# Altium PCB UltraZohm_ADC.PcbDoc (part 1 of 2)
Units mm, origin at the board's own origin, x right, y up, seen from the top; angles counter-clockwise.
Board outline 156.27 x 100.35 mm, 4 copper layers (Top Layer, GND, VCC, Bottom Layer), stack 0.778 mm thick; 243 components, 229 nets, 634 pads, 24 vias.
Unrouted connection lines stored in the file: 471.
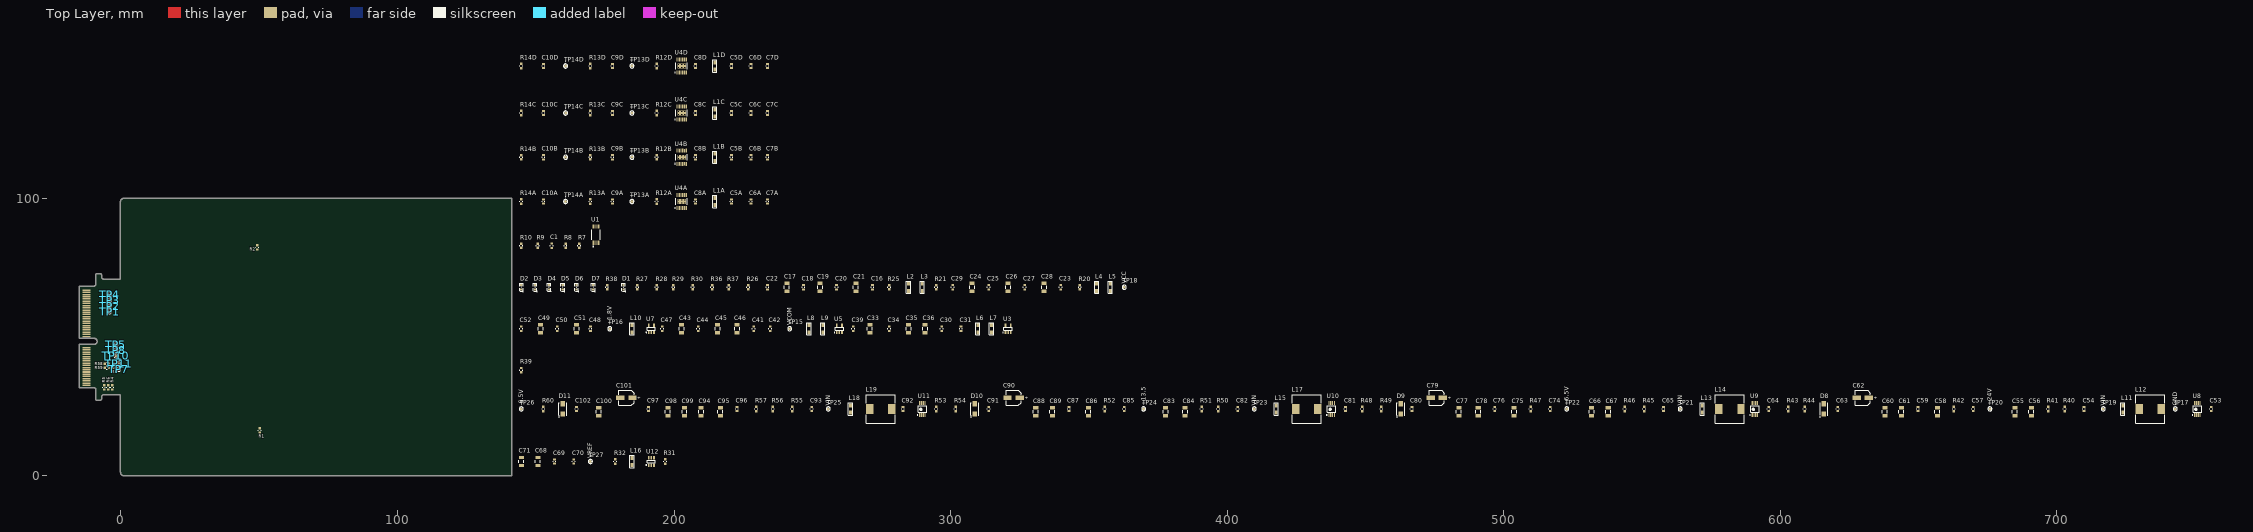
[diagram p0: Top Layer view]
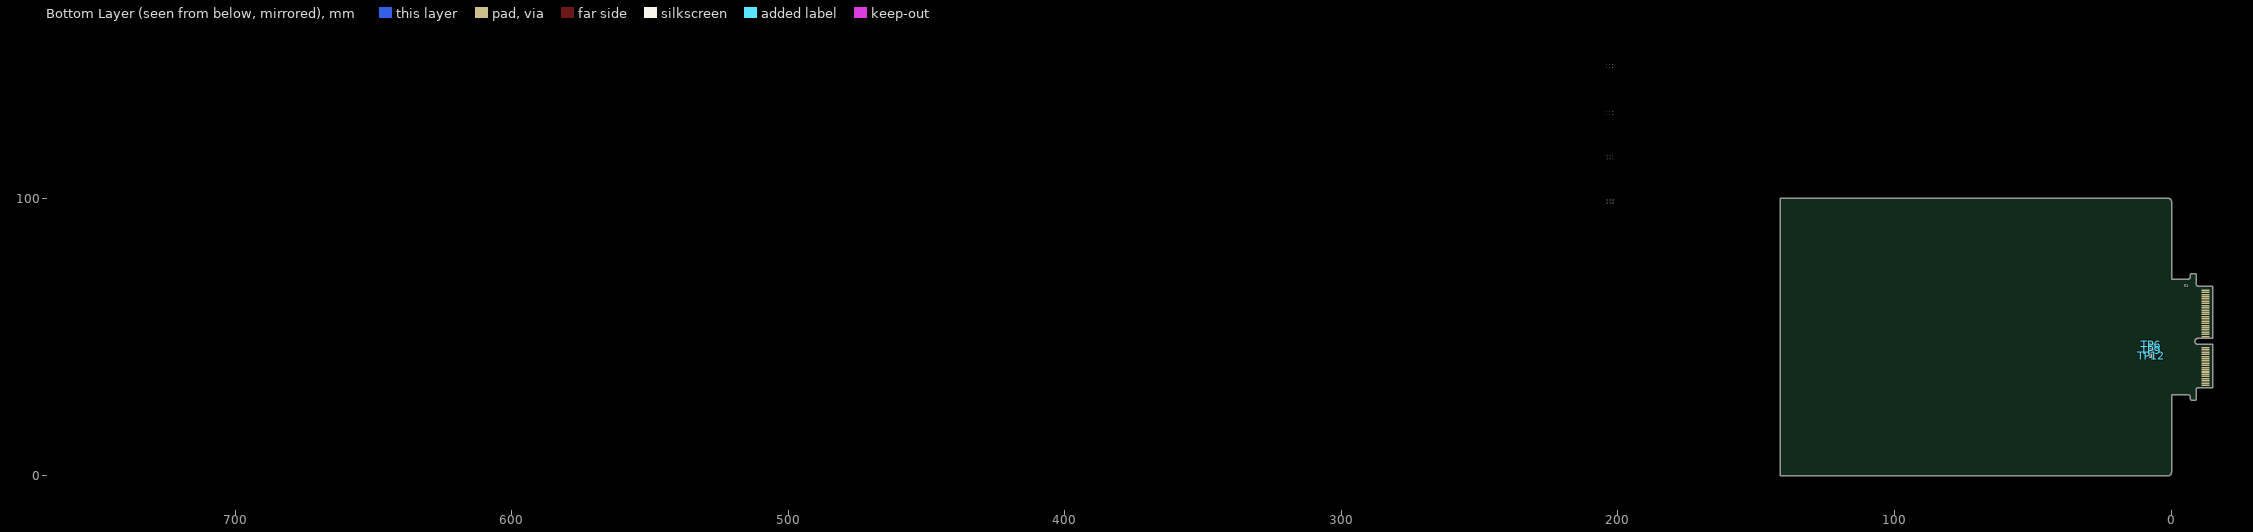
[diagram p1: Bottom Layer view, seen from below]

## Layer stack, top to bottom
Top Solder: solder mask 0.0102, Solder Resist, Dk 3.5
Top Layer: signal copper 0.0356
Dielectric 1: core 0.254, FR-4, Dk 4.2
GND: signal copper 0.036
Dielectric 3: prepreg 0.127, Dk 4.2
VCC: signal copper 0.036
Dielectric 2: core 0.254, Dk 4.2
Bottom Layer: signal copper 0.0356
Bottom Solder: solder mask 0.0102, Solder Resist, Dk 3.5

## Board outline
-14.859,31.694 cw(c-14.859,31.821) -14.986,31.821 -14.986,47.246 cw(c-14.859,47.246) -14.859,47.373 -9.659,47.373 ccw(c-9.659,48.446) -8.586,48.446 ccw(c-9.659,48.446) -9.659,49.519 -14.859,49.519 cw(c-14.859,49.646) -14.986,49.646 -14.986,68.271 cw(c-14.859,68.271) -14.859,68.398 -9.859,68.398 ccw(c-9.859,69.271) -8.986,69.271 -8.986,72.771 cw(c-8.859,72.771) -8.859,72.898 -7.479,72.898 cw(c-7.479,72.371) -6.952,72.371 -6.952,71.771 ccw(c-6.079,71.771) -6.079,70.898 -0.146,70.898 -0.146,98.854 cw(c1.219,98.854) 1.219,100.219 141.141,100.219 cw(c141.141,100.092) 141.231,100.182 141.25,100.163 cw(c141.161,100.074) 141.287,100.073 141.287,0 cw(c141.16,0) 141.16,-0.127 1.127,-0.127 cw(c1.127,1.127) -0.127,1.127 -0.127,29.194 -6.079,29.194 ccw(c-6.079,28.321) -6.952,28.321 -6.952,27.721 cw(c-7.479,27.721) -7.479,27.194 -8.859,27.194 cw(c-8.859,27.321) -8.986,27.321 -8.986,30.821 ccw(c-9.859,30.821) -9.859,31.694

## Design rules (kind name [scope] priority, off if disabled: settings)
BoardOutlineClearance BoardOutlineClearance_TopOverlay [OnLayer('Top Overlay') or OnLayer('Bottom Overlay')] p1: gap=0 ignorepadtopadclearanceinfootprint=FALSE
BoardOutlineClearance [All] p2: gap=0.508 ignorepadtopadclearanceinfootprint=FALSE except(0: Arc-SplitContinuation Track-SplitContinuation SMDPad-SplitContinuation THPad-SplitContinuation Via-SplitContinuation Fill-SplitContinuation Poly-SplitContinuation Region-SplitContinuation Text-OutlineEdge Text-CavityEdge Text-CutoutEdge Text-SplitBarrior Text-SplitContinuation; 0.254: SMDPad-OutlineEdge SMDPad-CavityEdge SMDPad-CutoutEdge SMDPad-SplitBarrior)
Clearance [All] p1: gap=0.089 ignorepadtopadclearanceinfootprint=FALSE except(0: Arc-Text Arc-Hole Track-Text Track-Hole SMDPad-Text SMDPad-Hole THPad-Text THPad-Hole Via-Text Via-Hole Fill-Text Fill-Hole Poly-Text Poly-Hole Region-Text Region-Hole Text-Text Text-Hole; 0.127: Arc-Via Track-Via SMDPad-Via THPad-Via Via-Via)
DiffPairsRouting [All] p1: maxlimit=0.254 minlimit=0.089 mostfreqgap=0.178 toplayer_minwidth=0.089 toplayer_maxwidth=0.381 toplayer_prefwidth=0.254 midlayer1_minwidth=0.089 midlayer1_maxwidth=0.381 midlayer1_prefwidth=0.254 midlayer2_minwidth=0.089 midlayer2_maxwidth=0.381 midlayer2_prefwidth=0.254 bottomlayer_minwidth=0.089 bottomlayer_maxwidth=0.381 bottomlayer_prefwidth=0.254 maxuncoupledlength=12.7
HoleSize [All] p1: absolutevalues=TRUE maxlimit=6.3 minlimit=0.2 maxpercent=80.000 minpercent=20.000
MatchedLengths [All] p1: tolerance=0.254 checknetsindiffpair=TRUE checkdiffpairvsdiffpair=FALSE checkxsignals=FALSE checkothers=FALSE
MinimumSolderMaskSliver [All] p1: minsoldermaskwidth=0.089
PlaneConnect [All] p1: pad.planeconnectstyle=Relief pad.reliefexpansion=0.508 pad.reliefentries=4 pad.reliefconductorwidth=0.254 pad.reliefairgap=0.254 via.planeconnectstyle=Direct via.reliefexpansion=0.508 via.reliefentries=4 via.reliefconductorwidth=0.254 via.reliefairgap=0.254
PolygonConnect PolygonConnect_GND [InNet('GND')] p1: thpad.connectstyle=Relief thpad.reliefconductorwidth=0.254 thpad.reliefentries=4 thpad.polygonreliefangle="90 Angle" thpad.airgapwidth=0.254 smdpad.connectstyle=Relief smdpad.reliefconductorwidth=0.254 smdpad.reliefentries=4 smdpad.polygonreliefangle="90 Angle" smdpad.airgapwidth=0.254 via.connectstyle=Direct via.reliefconductorwidth=0.254 via.reliefentries=4 via.polygonreliefangle="90 Angle" via.airgapwidth=0.254
PolygonConnect [All] p2: connectstyle=Direct reliefconductorwidth=0.254 reliefentries=4 polygonreliefangle="90 Angle" airgapwidth=0.127
RoomDefinition Power_Pos [InComponentClass('Power_Pos')] p1: confinementstyle=ConfineIn formatcopy=TRUE lockcomponents=FALSE outline 142.791,65.012 368.791,65.012 368.791,79.012 142.791,79.012
RoomDefinition Power_Neg [InComponentClass('Power_Neg')] p2: confinementstyle=ConfineIn formatcopy=TRUE lockcomponents=FALSE outline 142.791,50.012 322.791,50.012 322.791,64.012 142.791,64.012
RoomDefinition OpAmp4 [InComponentClass('OpAmp4')] p3: confinementstyle=ConfineIn formatcopy=TRUE lockcomponents=FALSE outline -21.209,-30.988 29.591,-30.988 29.591,-5.588 -21.209,-5.588
RoomDefinition OpAmp3 [InComponentClass('OpAmp3')] p4: confinementstyle=ConfineIn formatcopy=TRUE lockcomponents=FALSE outline -21.209,-30.988 29.591,-30.988 29.591,-5.588 -21.209,-5.588
RoomDefinition OpAmp2 [InComponentClass('OpAmp2')] p5: confinementstyle=ConfineIn formatcopy=TRUE lockcomponents=FALSE outline -21.209,-30.988 29.591,-30.988 29.591,-5.588 -21.209,-5.588
RoomDefinition OpAmp1 [InComponentClass('OpAmp1')] p6: confinementstyle=ConfineIn formatcopy=TRUE lockcomponents=FALSE outline -21.209,-30.988 29.591,-30.988 29.591,-5.588 -21.209,-5.588
RoomDefinition IEPE4 [InComponentClass('IEPE4')] p7: confinementstyle=ConfineIn formatcopy=TRUE lockcomponents=FALSE outline -21.209,-30.988 29.591,-30.988 29.591,-5.588 -21.209,-5.588
RoomDefinition IEPE3 [InComponentClass('IEPE3')] p8: confinementstyle=ConfineIn formatcopy=TRUE lockcomponents=FALSE outline -21.209,-30.988 29.591,-30.988 29.591,-5.588 -21.209,-5.588
RoomDefinition IEPE2 [InComponentClass('IEPE2')] p9: confinementstyle=ConfineIn formatcopy=TRUE lockcomponents=FALSE outline -21.209,-30.988 29.591,-30.988 29.591,-5.588 -21.209,-5.588
RoomDefinition IEPE1 [InComponentClass('IEPE1')] p10: confinementstyle=ConfineIn formatcopy=TRUE lockcomponents=FALSE outline -21.209,-30.988 29.591,-30.988 29.591,-5.588 -21.209,-5.588
RoomDefinition I2C [InComponentClass('I2C')] p11: confinementstyle=ConfineIn formatcopy=TRUE lockcomponents=FALSE outline 142.791,36.012 148.791,36.012 148.791,49.012 142.791,49.012
RoomDefinition ADC_Ref_1 [InComponentClass('ADC_Ref')] p12: confinementstyle=ConfineIn formatcopy=TRUE lockcomponents=FALSE outline 142.791,18.012 759.791,18.012 759.791,35.012 142.791,35.012
RoomDefinition ADC_Ref [InComponentClass('ADC_Ref')] p13: confinementstyle=ConfineIn formatcopy=TRUE lockcomponents=FALSE outline 142.791,18.012 759.791,18.012 759.791,35.012 142.791,35.012
RoomDefinition ADC4 [InComponentClass('ADC4')] p14: confinementstyle=ConfineIn formatcopy=TRUE lockcomponents=FALSE outline 142.791,144.012 237.791,144.012 237.791,159.012 142.791,159.012
RoomDefinition ADC3 [InComponentClass('ADC3')] p15: confinementstyle=ConfineIn formatcopy=TRUE lockcomponents=FALSE outline 142.791,127.012 237.791,127.012 237.791,142.012 142.791,142.012
RoomDefinition ADC2 [InComponentClass('ADC2')] p16: confinementstyle=ConfineIn formatcopy=TRUE lockcomponents=FALSE outline 142.791,111.012 237.791,111.012 237.791,126.012 142.791,126.012
RoomDefinition ADC1 [InComponentClass('ADC1')] p17: confinementstyle=ConfineIn formatcopy=TRUE lockcomponents=FALSE outline 142.791,95.012 237.791,95.012 237.791,110.012 142.791,110.012
RoomDefinition U_CarrierConnector [InComponentClass('U_CarrierConnector')] p18: confinementstyle=ConfineIn formatcopy=TRUE lockcomponents=FALSE outline -15.113,26.772 -15.113,72.756 3.987,72.756 3.987,48.298 8.166,48.298 8.166,42.126 3.987,42.126 3.987,26.772
RoutingVias [All] p1: holewidth=0.3 width=0.6 viastyle="Through Hole" minholewidth=0.2 minwidth=0.45 maxholewidth=0.8 maxwidth=1.6
SilkToSilkClearance [All] p1: silktosilkclearance=0
SilkToSolderMaskClearance [IsPad] p1: minsilkscreentomaskgap=0 clearancetoexposedcopper=TRUE
SolderMaskExpansion [All] p1: expansion=0.102
Width [All] p1: maxlimit=0.762 minlimit=0.089 preferedwidth=0.254
24 further rules are at their usual default settings.

## Classes and differential pairs
channel class OpAmp: OpAmp1 OpAmp2 OpAmp3 OpAmp4
channel class IEPE: IEPE1 IEPE2 IEPE3 IEPE4
channel class ADC: ADC1 ADC2 ADC3 ADC4
net class S55: CVN1 CVN2 CVN3 CVN4
net class OUT[0..15]: OUT0 OUT1 OUT2 OUT3 OUT4 OUT5 OUT6 OUT7 OUT8 OUT9 OUT10 OUT11 OUT12 OUT13 OUT14 OUT15
net class CVN[1..4]: CVN1 CVN2 CVN3 CVN4
net class ADC_OUT_P[1..4]: ADC_OUT_P1 ADC_OUT_P2 ADC_OUT_P3 ADC_OUT_P4
net class ADC_OUT_N[1..4]: ADC_OUT_N1 ADC_OUT_N2 ADC_OUT_N3 ADC_OUT_N4
component class Power_Pos: C16 C17 C18 C19 C20 C21 C22 C23 C24 C25 C26 C27 C28 C29 D1 D2 D3 D4 D5 D6 D7 L2 L3 L4 L5 R20 R21 R25 R26 R27 R28 R29 R30 R36 R37 R38 TP18 U2 U6
component class Power_Neg: C30 C31 C33 C34 C35 C36 C39 C41 C42 C43 C44 C45 C46 C47 C48 C49 C50 C51 C52 L6 L7 L8 L9 L10 TP7 TP8 TP9 TP15 TP16 U3 U5 U7
component class OpAmp4: C12D C13D C14D C15D IC1D R15D R16D R17D R18D R19D R22D R23D R24D
component class OpAmp3: C12C C13C C14C C15C IC1C R15C R16C R17C R18C R19C R22C R23C R24C
component class OpAmp2: C12B C13B C14B C15B IC1B R15B R16B R17B R18B R19B R22B R23B R24B
component class OpAmp1: C12A C13A C14A C15A IC1A R15A R16A R17A R18A R19A R22A R23A R24A
component class IEPE4: 3.5mAD C2D C3D C32D C37D C38D C40D C72D C73D J1D OPAMP1D OPAMP2D R11D R33D R34D R35D R82kD
component class IEPE3: 3.5mAC C2C C3C C32C C37C C38C C40C C72C C73C J1C OPAMP1C OPAMP2C R11C R33C R34C R35C R82kC
component class IEPE2: 3.5mAB C2B C3B C32B C37B C38B C40B C72B C73B J1B OPAMP1B OPAMP2B R11B R33B R34B R35B R82kB
component class IEPE1: 3.5mAA C2A C3A C32A C37A C38A C40A C72A C73A J1A OPAMP1A OPAMP2A R11A R33A R34A R35A R82kA
component class I2C: IC2 IC3 R39
component class ADC_Ref: C53 C54 C55 C56 C57 C58 C59 C60 C61 C62 C63 C64 C65 C66 C67 C74 C75 C76 C77 C78 C79 C80 C81 C82 C83 C84 C85 C86 C87 C88 C89 C90 C91 C92 C93 C94 C95 C96 C97 C98 C99 C100 C101 C102 D8 D9 D10 D11 L11 L12 L13 L14 L15 L17 L18 L19 R40 R41 R42 R43 R44 R45 R46 R47 R48 R49 R50 R51 R52 R53 R54 R55 R56 R57 R59 R60 TP17 TP19 TP20 TP21 TP22 TP23 TP24 TP25 TP26 U8 U9 U10 U11
component class ADC4: C4D C5D C6D C7D C8D C9D C10D C11D L1D R12D R13D R14D TP13D TP14D U4D
component class ADC3: C4C C5C C6C C7C C8C C9C C10C C11C L1C R12C R13C R14C TP13C TP14C U4C
component class ADC2: C4B C5B C6B C7B C8B C9B C10B C11B L1B R12B R13B R14B TP13B TP14B U4B
component class ADC1: C4A C5A C6A C7A C8A C9A C10A C11A L1A R12A R13A R14A TP13A TP14A U4A
net class BOUT_P[1..4]: BOUT_P1 BOUT_P2 BOUT_P3 BOUT_P4
net class BOUT_N[1..4]: BOUT_N1 BOUT_N2 BOUT_N3 BOUT_N4
component class U_CarrierConnector: C1 R1 R2 R3 R4 R5 R6 R7 R8 R9 R10 R58 TP1 TP2 TP3 TP4 TP5 TP6 TP10 TP11 TP12 U1 X1
differential pair CLK: +CLK_P -CLK_N
differential pair ADC_OUT4: +ADC_OUT_P4 -ADC_OUT_N4
differential pair ADC_OUT3: +ADC_OUT_P3 -ADC_OUT_N3
differential pair ADC_OUT2: +ADC_OUT_P2 -ADC_OUT_N2
differential pair ADC_OUT1: +ADC_OUT_P1 -ADC_OUT_N1
differential pair ADC_IND: +ADC_IND_P -ADC_IND_N
differential pair ADC_INC: +ADC_INC_P -ADC_INC_N
differential pair ADC_INB: +ADC_INB_P -ADC_INB_N
differential pair ADC_INA: +ADC_INA_P -ADC_INA_N
differential pair BCLK: +BCLK_P -BCLK_N

## Components (designator, comment, footprint, x,y, rotation, side; value= is the part's Value field where it differs from the comment)
C1 "100nF" CAPC1608X07N 155.791,83.012 r90 top
C5A "100nF" CAPC1608X07N 220.791,99.012 r90 top (schematic designator C5)
C5B "100nF" CAPC1608X07N 220.791,115.012 r90 top (schematic designator C5)
C5C "100nF" CAPC1608X07N 220.791,131.012 r90 top (schematic designator C5)
C5D "100nF" CAPC1608X07N 220.791,148.012 r90 top (schematic designator C5)
C6A "1µF" CAPC1608X07N 227.791,99.012 r90 top (schematic designator C6)
C6B "1µF" CAPC1608X07N 227.791,115.012 r90 top (schematic designator C6)
C6C "1µF" CAPC1608X07N 227.791,131.012 r90 top (schematic designator C6)
C6D "1µF" CAPC1608X07N 227.791,148.012 r90 top (schematic designator C6)
C7A "1µF" CAPC1608X07N 233.791,99.012 r90 top (schematic designator C7)
C7B "1µF" CAPC1608X07N 233.791,115.012 r90 top (schematic designator C7)
C7C "1µF" CAPC1608X07N 233.791,131.012 r90 top (schematic designator C7)
C7D "1µF" CAPC1608X07N 233.791,148.012 r90 top (schematic designator C7)
C8A "18nF" CAPC1608X07N 207.791,99.012 r90 top (schematic designator C8)
C8B "18nF" CAPC1608X07N 207.791,115.012 r90 top (schematic designator C8)
C8C "18nF" CAPC1608X07N 207.791,131.012 r90 top (schematic designator C8)
C8D "18nF" CAPC1608X07N 207.791,148.012 r90 top (schematic designator C8)
C9A "12nF" CAPC1608X07N 177.791,99.012 r90 top (schematic designator C9)
C9B "12nF" CAPC1608X07N 177.791,115.012 r90 top (schematic designator C9)
C9C "12nF" CAPC1608X07N 177.791,131.012 r90 top (schematic designator C9)
C9D "12nF" CAPC1608X07N 177.791,148.012 r90 top (schematic designator C9)
C10A "18nF" CAPC1608X07N 152.791,99.012 r90 top (schematic designator C10)
C10B "18nF" CAPC1608X07N 152.791,115.012 r90 top (schematic designator C10)
C10C "18nF" CAPC1608X07N 152.791,131.012 r90 top (schematic designator C10)
C10D "18nF" CAPC1608X07N 152.791,148.012 r90 top (schematic designator C10)
C16 "10nF" CAPC1608X07N 271.791,68.012 r90 top
C17 "10µF" C_1206 240.791,68.012 r90 top
C18 "100nF" CAPC1608X07N 246.791,68.012 r90 top
C19 "10µF" C_1206 252.791,68.012 r90 top
C20 "100nF" CAPC1608X07N 258.791,68.012 r90 top
C21 "10µF" C_1206 265.791,68.012 r90 top
C22 "10nF" CAPC1608X07N 233.791,68.012 r90 top
C23 "10nF" CAPC1608X07N 339.791,68.012 r90 top
C24 "10µF" C_1206 307.791,68.012 r90 top
C25 "100nF" CAPC1608X07N 313.791,68.012 r90 top
C26 "10µF" C_1206 320.791,68.012 r90 top
C27 "100nF" CAPC1608X07N 326.791,68.012 r90 top
C28 "10µF" C_1206 333.791,68.012 r90 top
C29 "10nF" CAPC1608X07N 300.791,68.012 r90 top
C30 "100nF" CAPC1608X07N 296.791,53.012 r90 top
C31 "100nF" CAPC1608X07N 303.791,53.012 r90 top
C33 "10µF" C_1206 270.791,53.012 r90 top
C34 "100nF" CAPC1608X07N 277.791,53.012 r90 top
C35 "10µF" C_1206 284.791,53.012 r90 top
C36 "10µF" C_1206 290.791,53.012 r90 top
C39 "10nF" CAPC1608X07N 264.791,53.012 r90 top
C41 "100nF" CAPC1608X07N 228.791,53.012 r90 top
C42 "100nF" CAPC1608X07N 234.791,53.012 r90 top
C43 "10µF" C_1206 202.791,53.012 r90 top
C44 "100nF" CAPC1608X07N 208.791,53.012 r90 top
C45 "10µF" C_1206 215.791,53.012 r90 top
C46 "10µF" C_1206 222.791,53.012 r90 top
C47 "10nF" CAPC1608X07N 195.791,53.012 r90 top
C48 "100nF" CAPC1608X07N 169.791,53.012 r90 top
C49 "10µF" C_1206 151.791,53.012 r90 top
C50 "100nF" CAPC1608X07N 157.791,53.012 r90 top
C51 "10µF" C_1206 164.791,53.012 r90 top
C52 "10nF" CAPC1608X07N 144.791,53.012 r90 top
C53 "10nF" CAPC1608X07N 755.791,24.012 r90 top
C54 "7.5nF" CAPC1608X07N 709.791,24.012 r90 top
C55 "10µF" C_1206 684.791,23.012 r90 top
C56 "10µF" C_1206 690.791,23.012 r90 top
C57 "100nF" CAPC1608X07N 669.791,24.012 r90 top
C58 "0.027µF" C_1206 656.791,23.012 r90 top
C59 "100nF" CAPC1608X07N 649.791,24.012 r90 top
C60 "10µF" C_1206 637.791,23.012 r90 top
C61 "10µF" C_1206 643.791,23.012 r90 top
C62 "47uF" WCAP-ASLI_5x5.5 629.791,28.012 r0 top
C63 "100nF" CAPC1608X07N 620.791,24.012 r90 top
C64 "10nF" CAPC1608X07N 595.791,24.012 r90 top
C65 "7.5nF" CAPC1608X07N 557.791,24.012 r90 top
C66 "10µF" C_1206 531.791,23.012 r90 top
C67 "10µF" C_1206 537.791,23.012 r90 top
C68 "10µF" C_1206 150.791,5.012 r90 top
C69 "100nF" CAPC1608X07N 156.791,5.012 r90 top
C70 "100nF" CAPC1608X07N 163.791,5.012 r90 top
C71 "10µF" C_1206 144.791,5.012 r90 top
C74 "100nF" CAPC1608X07N 516.791,24.012 r90 top
C75 "0.027µF" C_1206 503.791,23.012 r90 top
C76 "100nF" CAPC1608X07N 496.791,24.012 r90 top
C77 "10µF" C_1206 483.791,23.012 r90 top
C78 "10µF" C_1206 490.791,23.012 r90 top
C79 "47uF" WCAP-ASLI_5x5.5 475.791,28.012 r0 top
C80 "100nF" CAPC1608X07N 466.791,24.012 r90 top
C81 "10nF" CAPC1608X07N 442.791,24.012 r90 top
C82 "7.5nF" CAPC1608X07N 403.791,24.012 r90 top
C83 "10µF" C_1206 377.791,23.012 r90 top
C84 "10µF" C_1206 384.791,23.012 r90 top
C85 "100nF" CAPC1608X07N 362.791,24.012 r90 top
C86 "0.027µF" C_1206 349.791,23.012 r90 top
C87 "100nF" CAPC1608X07N 342.791,24.012 r90 top
C88 "10µF" C_1206 330.791,23.012 r90 top
C89 "10µF" C_1206 336.791,23.012 r90 top
C90 "47uF" WCAP-ASLI_5x5.5 322.791,28.012 r0 top
C91 "100nF" CAPC1608X07N 313.791,24.012 r90 top
C92 "10nF" CAPC1608X07N 282.791,24.012 r90 top
C93 "dnp" CAPC1608X07N 249.791,24.012 r90 top
C94 "10µF" C_1206 209.791,23.012 r90 top
C95 "10µF" C_1206 216.791,23.012 r90 top
C96 "100nF" CAPC1608X07N 222.791,24.012 r90 top
C97 "100nF" CAPC1608X07N 190.791,24.012 r90 top
C98 "10µF" C_1206 197.791,23.012 r90 top
C99 "10µF" C_1206 203.791,23.012 r90 top
C100 "dnp" C_1206 172.791,23.012 r90 top
C101 "47uF" WCAP-ASLI_5x5.5 182.791,28.012 r0 top
C102 "100nF" CAPC1608X07N 164.791,24.012 r90 top
D1 "150060GS75000" WL-SMCW_0603 181.791,68.012 r90 top
D2 "150060BS75000" WL-SMCW_0603 144.791,68.012 r90 top
D3 "150060GS75000" WL-SMCW_0603 149.791,68.012 r90 top
D4 "150060GS75000" WL-SMCW_0603 154.791,68.012 r90 top
D5 "150060RS75000" WL-SMCW_0603 159.791,68.012 r90 top
D6 "150060RS75000" WL-SMCW_0603 164.791,68.012 r90 top
D7 "150060RS75000" WL-SMCW_0603 170.791,68.012 r90 top
D8 "BYS12-90" DIOM4227X23N 615.791,24.012 r90 top
D9 "BYS12-90" DIOM4227X23N 462.791,24.012 r90 top
D10 "BYS12-90" DIOM4227X23N 308.791,24.012 r90 top
D11 "BYS12-90" DIOM4227X23N 159.791,24.012 r90 top
L1A "600Ω" "WE-CBF_0805_High Current" 214.791,99.012 r90 top value=600O (schematic designator L1)
L1B "600Ω" "WE-CBF_0805_High Current" 214.791,115.012 r90 top value=600O (schematic designator L1)
L1C "600Ω" "WE-CBF_0805_High Current" 214.791,131.012 r90 top value=600O (schematic designator L1)
L1D "600Ω" "WE-CBF_0805_High Current" 214.791,148.012 r90 top value=600O (schematic designator L1)
L2 "600Ω" "WE-CBF_0805_High Current" 284.791,68.012 r90 top value=600O
L3 "600Ω" "WE-CBF_0805_High Current" 289.791,68.012 r90 top value=600O
L4 "600Ω" "WE-CBF_0805_High Current" 352.791,68.012 r90 top value=600O
L5 "600Ω" "WE-CBF_0805_High Current" 357.791,68.012 r90 top value=600O
L6 "600Ω" "WE-CBF_0805_High Current" 309.791,53.012 r90 top value=600O
L7 "600Ω" "WE-CBF_0805_High Current" 314.791,53.012 r90 top value=600O
L8 "600Ω" "WE-CBF_0805_High Current" 248.791,53.012 r90 top value=600O
L9 "600Ω" "WE-CBF_0805_High Current" 253.791,53.012 r90 top value=600O
L10 "600Ω" "WE-CBF_0805_High Current" 184.791,53.012 r90 top value=600O
L11 "600Ω" "WE-CBF_0805_High Current" 723.791,24.012 r90 top value=600O
L12 "150mH" SMT_inductor_1050_Performance 733.791,24.012 r90 top
L13 "600Ω" "WE-CBF_0805_High Current" 571.791,24.012 r90 top value=600O
L14 "150mH" SMT_inductor_1050_Performance 581.791,24.012 r90 top
L15 "600Ω" "WE-CBF_0805_High Current" 417.791,24.012 r90 top value=600O
L16 "600Ω" "WE-CBF_0805_High Current" 184.791,5.012 r90 top value=600O
L17 "150mH" SMT_inductor_1050_Performance 428.791,24.012 r90 top
L18 "600Ω" "WE-CBF_0805_High Current" 263.791,24.012 r90 top value=600O
L19 "150mH" SMT_inductor_1050_Performance 274.791,24.012 r90 top
R1 "100R" RESC1608X06N 50.165,16.256 r270 top
R2 "100R" RESC1608X06N 49.276,82.423 r270 top
R3 "0R" RESC1608X06N -2.794,39.624 r90 top
R4 "0R" RESC1608X06N -3.086,31.79 r90 top
R5 "0R" RESC1608X06N -6.071,31.79 r270 top
R6 "0R" RESC1608X06N -4.572,31.79 r90 top
R7 "4.99R" RESC1608X06N 165.791,83.012 r90 top
R8 "4.99R" RESC1608X06N 160.791,83.012 r90 top
R9 "4.99R" RESC1608X06N 150.791,83.012 r90 top
R10 "4.99R" RESC1608X06N 144.791,83.012 r90 top
R12A "24R9" RESC1608X06N 193.791,99.012 r90 top (schematic designator R12)
R12B "24R9" RESC1608X06N 193.791,115.012 r90 top (schematic designator R12)
R12C "24R9" RESC1608X06N 193.791,131.012 r90 top (schematic designator R12)
R12D "24R9" RESC1608X06N 193.791,148.012 r90 top (schematic designator R12)
R13A "24R9" RESC1608X06N 169.791,99.012 r90 top (schematic designator R13)
R13B "24R9" RESC1608X06N 169.791,115.012 r90 top (schematic designator R13)
R13C "24R9" RESC1608X06N 169.791,131.012 r90 top (schematic designator R13)
R13D "24R9" RESC1608X06N 169.791,148.012 r90 top (schematic designator R13)
R14A "0R" RESC1608X06N 144.791,99.012 r90 top (schematic designator R14)
R14B "0R" RESC1608X06N 144.791,115.012 r90 top (schematic designator R14)
R14C "0R" RESC1608X06N 144.791,131.012 r90 top (schematic designator R14)
R14D "0R" RESC1608X06N 144.791,148.012 r90 top (schematic designator R14)
R20 "34.8k" RESC1608X06N 346.791,68.012 r90 top
R21 "10.2k" RESC1608X06N 294.791,68.012 r90 top
R25 "34.8k" RESC1608X06N 277.791,68.012 r90 top
R26 "10k" RESC1608X06N 226.791,68.012 r90 top
R27 "24.9k" RESC1608X06N 186.791,68.012 r90 top
R28 "6.04k" RESC1608X06N 193.791,68.012 r90 top
R29 "6.04k" RESC1608X06N 199.791,68.012 r90 top
R30 "499R" RESC1608X06N 206.791,68.012 r90 top
R31 "0R" RESC1608X06N 196.791,5.012 r90 top
R32 "0R" RESC1608X06N 178.791,5.012 r90 top
R36 "499R" RESC1608X06N 213.791,68.012 r90 top
R37 "499R" RESC1608X06N 219.791,68.012 r90 top
R38 "6.04k" RESC1608X06N 175.791,68.012 r90 top
R39 "0R" RESC1608X06N 144.791,38.012 r90 top value=1M
R40 "162k" RESC1608X06N 702.791,24.012 r90 top
R41 "75k" RESC1608X06N 696.791,24.012 r90 top
R42 "1.62k" RESC1608X06N 662.791,24.012 r90 top
R43 "133k" RESC1608X06N 602.791,24.012 r90 top
R44 "1.02k" RESC1608X06N 608.791,24.012 r90 top
R45 "162k" RESC1608X06N 550.791,24.012 r90 top
R46 "75k" RESC1608X06N 543.791,24.012 r90 top
R47 "1.62k" RESC1608X06N 509.791,24.012 r90 top
R48 "133k" RESC1608X06N 448.791,24.012 r90 top
R49 "1.02k" RESC1608X06N 455.791,24.012 r90 top
R50 "162k" RESC1608X06N 396.791,24.012 r90 top
R51 "75k" RESC1608X06N 390.791,24.012 r90 top
R52 "1.62k" RESC1608X06N 355.791,24.012 r90 top
R53 "133k" RESC1608X06N 294.791,24.012 r90 top
R54 "1.02k" RESC1608X06N 301.791,24.012 r90 top
R55 "162k" RESC1608X06N 242.791,24.012 r90 top
R56 "dnp" RESC1608X06N 235.791,24.012 r90 top
R57 "1.62k" RESC1608X06N 229.791,24.012 r90 top
R58 "0R" RESC1608X06N -5.08,40.386 r0 top
R59 "1.02k" RESC1608X06N -5.08,38.862 r180 top
R60 "133k" RESC1608X06N 152.791,24.012 r90 top
TP1 "ACLK_N" TP_1MM -4.064,59.182 r0 top value="Testpoint 1mm"
TP2 "ACLK_P" TP_1MM -4.064,61.214 r0 top value="Testpoint 1mm"
TP3 "BCLK_N" TP_1MM -4.064,63.246 r0 top value="Testpoint 1mm"
TP4 "BCLK_P" TP_1MM -4.064,65.278 r0 top value="Testpoint 1mm"
TP5 "PIN47" TP_1MM -1.778,47.244 r0 top value="Testpoint 1mm"
TP6 "PIN48" TP_1MM 7.112,47.244 r180 bottom value="Testpoint 1mm"
TP7 "OVCC" TP_1MM -0.762,38.354 r0 top value="Testpoint 1mm"
TP8 "VCOM" TP_1MM -1.778,45.212 r0 top value="Testpoint 1mm"
TP9 "OVCC" TP_1MM 7.112,45.212 r180 bottom value="Testpoint 1mm"
TP10 "PIN53" TP_1MM -1.778,43.18 r0 top value="Testpoint 1mm"
TP11 "CVN_B" TP_1MM -0.762,40.386 r0 top value="Testpoint 1mm"
TP12 "PIN56" TP_1MM 7.112,43.18 r180 bottom value="Testpoint 1mm"
TP13A "+" TP_1mm 184.791,99.012 r90 top (schematic designator TP13)
TP13B "+" TP_1mm 184.791,115.012 r90 top (schematic designator TP13)
TP13C "+" TP_1mm 184.791,131.012 r90 top (schematic designator TP13)
TP13D "+" TP_1mm 184.791,148.012 r90 top (schematic designator TP13)
TP14A "-" TP_1mm 160.791,99.012 r90 top (schematic designator TP14)
TP14B "-" TP_1mm 160.791,115.012 r90 top (schematic designator TP14)
TP14C "-" TP_1mm 160.791,131.012 r90 top (schematic designator TP14)
TP14D "-" TP_1mm 160.791,148.012 r90 top (schematic designator TP14)
TP15 "VCOM" TP_1mm 241.791,53.012 r90 top value="Testpoint 1mm"
TP16 "+1.8V" TP_1mm 176.791,53.012 r90 top value="Testpoint 1mm"
TP17 "GND" TP_1mm 742.791,24.012 r90 top value="Testpoint 1mm"
TP18 "VCC" TP_1mm 362.791,68.012 r90 top value="Testpoint 1mm"
TP19 "VIN" TP_1mm 716.791,24.012 r90 top value="Testpoint 1mm"
TP20 "+24V" TP_1mm 675.791,24.012 r90 top value="Testpoint 1mm"
TP21 "VIN" TP_1mm 563.791,24.012 r90 top value="Testpoint 1mm"
TP22 "+6.5V" TP_1mm 522.791,24.012 r90 top value="Testpoint 1mm"
TP23 "VIN" TP_1mm 409.791,24.012 r90 top value="Testpoint 1mm"
TP24 "+13.5" TP_1mm 369.791,24.012 r90 top value="Testpoint 1mm"
TP25 "VIN" TP_1mm 255.791,24.012 r90 top value="Testpoint 1mm"
TP26 "-6.5V" TP_1mm 144.791,24.012 r90 top value="Testpoint 1mm"
TP27 "VREF" TP_1mm 169.791,5.012 r90 top value="Testpoint 1mm"
U1 "LMK1C1104" FP-PW0008A-MFG 171.791,87.012 r90 top
U3 "LP2985A-25" SOT95P250X110-5N 320.791,53.012 r90 top
U4A "LTC2311" TSSOP50P510X110_HS-17N 202.791,99.012 r90 top (schematic designator U4)
U4B "LTC2311" TSSOP50P510X110_HS-17N 202.791,115.012 r90 top (schematic designator U4)
U4C "LTC2311" TSSOP50P510X110_HS-17N 202.791,131.012 r90 top (schematic designator U4)
U4D "LTC2311" TSSOP50P510X110_HS-17N 202.791,148.012 r90 top (schematic designator U4)
U5 "LP2985A-25" SOT95P250X110-5N 259.791,53.012 r90 top
U7 "LP2985A-18" SOT95P250X110-5N 191.791,53.012 r90 top
U8 "LM5007" TSOP65P490X110-8N 750.791,24.012 r90 top
U9 "LM5007" TSOP65P490X110-8N 590.791,24.012 r90 top
U10 "LM5007" TSOP65P490X110-8N 437.791,24.012 r90 top
U11 "LM5007" TSOP65P490X110-8N 289.791,24.012 r90 top
U12 "LT6654-5" SOT95P280X100-6N 191.791,5.012 r90 top
X1 "HSEC8-140-01-XX-DV-A-BL-CARD" HSEC8-140-01-XX-DV-A-BL-CARD -14.846,49.764 r270 bottom

## Footprints (in the part's own frame and the unit in brackets; to place one, negate y for a bottom-side part, rotate by r counter-clockwise, add the part's x,y. Pads: shape width x height; smd on the part's side, far side on the other; paste and mask are expansions set on the pad)
C_1206 [mm]
  rect 1.21x1.82 smd: 1(1.45,0) 2(-1.45,0)
  silkscreen extent -0.5,-0.9 0.5,0.9, body extent -1.6,-0.81 1.6,0.81, height 1.82
CAPC1608X07N [mm] "Chip Capacitor, 2-Leads, Body 1,60x0,80mm, IPC Medium Density"
  rect 0.7x1 smd: 1(-0.775,0) 2(0.775,0)
  silkscreen extent -0.13,-0.51 0.13,0.51, body extent -0.88,-0.48 0.88,0.47, height 0.7
DIOM4227X23N [mm] "Molded Diode, 2-Leads, Body 4,25x2,67mm, IPC Medium Density"
  rect 1.92x1.68 smd: 1(-1.854,0.023) 2(1.906,0.023)
  silkscreen extent -3,-1.38 2.28,1.54, body extent -2.44,-1.37 2.5,1.42, height 2.29
FP-PW0008A-MFG [mm]
  rrect22% 1.5x0.45 smd paste+0 mask+0: 1(-2.9,0.975) 2(-2.9,0.325) 3(-2.9,-0.325) 4(-2.9,-0.975) 5(2.9,-0.975) 6(2.9,-0.325) 7(2.9,0.325) 8(2.9,0.975)
  silkscreen extent -4.37,-1.55 1.77,1.55, body extent -3.2,-1.5 3.2,1.5, height 1.2
HSEC8-140-01-XX-DV-A-BL-CARD [mm]
  rect 0.55x2.8 smd far side mask+0.05: 1(-17.2,-2.4) 3(-16.4,-2.4) 5(-15.6,-2.4) 7(-14.8,-2.4) 9(-14,-2.4) 11(-13.2,-2.4) 13(-12.4,-2.4) 15(-11.6,-2.4) 17(-10.8,-2.4) 19(-10,-2.4) 21(-9.2,-2.4) 23(-8.4,-2.4) 25(-7.6,-2.4) 27(-6.8,-2.4) 29(-6,-2.4) 31(-5.2,-2.4) 33(-4.4,-2.4) 35(-3.6,-2.4) 37(-2.8,-2.4) 39(-2,-2.4) 41(-1.2,-2.4) 43(-0.4,-2.4) 45(3.6,-2.4) 47(4.4,-2.4) 49(5.2,-2.4) 51(6,-2.4) 53(6.8,-2.4) 55(7.6,-2.4) 57(8.4,-2.4) 59(9.2,-2.4) 61(10,-2.4) 63(10.8,-2.4) 65(11.6,-2.4) 67(12.4,-2.4) 69(13.2,-2.4) 71(14,-2.4) 73(14.8,-2.4) 75(15.6,-2.4) 77(16.4,-2.4) 79(17.2,-2.4)
  rect 0.55x2.8 smd mask+0.05: 2(-17.2,-2.4) 4(-16.4,-2.4) 6(-15.6,-2.4) 8(-14.8,-2.4) 10(-14,-2.4) 12(-13.2,-2.4) 14(-12.4,-2.4) 16(-11.6,-2.4) 18(-10.8,-2.4) 20(-10,-2.4) 22(-9.2,-2.4) 24(-8.4,-2.4) 26(-7.6,-2.4) 28(-6.8,-2.4) 30(-6,-2.4) 32(-5.2,-2.4) 34(-4.4,-2.4) 36(-3.6,-2.4) 38(-2.8,-2.4) 40(-2,-2.4) 42(-1.2,-2.4) 44(-0.4,-2.4) 46(3.6,-2.4) 48(4.4,-2.4) 50(5.2,-2.4) 52(6,-2.4) 54(6.8,-2.4) 56(7.6,-2.4) 58(8.4,-2.4) 60(9.2,-2.4) 62(10,-2.4) 64(10.8,-2.4) 66(11.6,-2.4) 68(12.4,-2.4) 70(13.2,-2.4) 72(14,-2.4) 74(14.8,-2.4) 76(15.6,-2.4) 78(16.4,-2.4) 80(17.2,-2.4)
RESC1608X06N [mm] "Chip Resistor, 2-Leads, Body 1,60x0,80mm, IPC Medium Density"
  rect 0.85x0.9 smd: 1(-0.775,0) 2(0.775,0)
  silkscreen extent -0.13,-0.51 0.13,0.51, body extent -0.8,-0.4 0.8,0.4, height 0.44
SMT_inductor_1050_Performance [mm] "SMD Shielded Power Inductor, 2-leads, body 10.3x10.5mm"
  rect 3.6x2.7 smd: 1(0,4) 2(0,-4)
  silkscreen extent -5.15,-5.25 5.15,5.25, body extent -5,-5 5,5, height 4.79
SOT95P250X110-5N [mm] "SOT23, 5-Leads, Body 2,92x2,50mm, Pitch 0,95mm, IPC Medium Density"
  rect 1.22x0.6 smd: 1(-1.31,0.95) 2(-1.31,0) 3(-1.31,-0.95)
  rect 1.22x0.62 smd: 4(1.31,-0.95) 5(1.31,0.95)
  silkscreen extent -1.43,-1.5 0.5,1.93, body extent -0.87,-1.52 0.87,1.52, height 1.1
SOT95P280X100-6N [mm] "SOT23, 6-Leads, Body 2,90x2,80mm, Pitch 0,95mm, IPC Medium Density"
  rect 1.22x0.6 smd: 1(-1.31,0.95) 2(-1.31,0) 3(-1.31,-0.95) 4(1.31,-0.95) 5(1.31,0) 6(1.31,0.95)
  silkscreen extent -1.43,-1.5 0.5,1.93, body extent -0.87,-1.5 0.87,1.5, height 1
TP_1MM [mm]
  round 1 smd paste-1: 1(0,0)
  silkscreen extent -0.75,-0.75 0.75,0.75
TP_1mm [mm]
  round 1 smd paste-1: 1(0,0)
  silkscreen extent -0.75,-0.75 0.75,0.75
TSOP65P490X110-8N [mm] "TSOP, 8-Leads, Body 3,00x3,00mm, Pitch 0,65mm, IPC Medium Density"
  rect 1.45x0.45 smd: 1(-2.2,0.975) 2(-2.2,0.325) 3(-2.2,-0.325) 4(-2.2,-0.975) 5(2.2,-0.975) 6(2.2,-0.325) 7(2.2,0.325) 8(2.2,0.975)
  silkscreen extent -2.32,-1.55 1.15,1.87, body extent -1.55,-1.55 1.55,1.55, height 1.1
TSSOP50P510X110_HS-17N [mm] "TSSOP, 16-Leads, Body 4,03x3,00mm, Pitch 0,50mm, Thermal Pad 2,95x1,75mm, IPC Medium Density"
  oval 1.45x0.305 smd: 1(-2.375,1.75) 2(-2.375,1.25) 3(-2.375,0.75) 4(-2.375,0.25) 5(-2.375,-0.25) 6(-2.375,-0.75) 7(-2.375,-1.25) 8(-2.375,-1.75) 9(2.375,-1.75) 10(2.375,-1.25) 11(2.375,-0.75) 12(2.375,-0.25) 13(2.375,0.25) 14(2.375,0.75) 15(2.375,1.25) 16(2.375,1.75)
  rect 1.75x2.95 smd: 17(0,0)
  silkscreen extent -2.5,-2.08 1.15,2.58, body extent -1.55,-2.1 1.55,2.1, height 1.1
WCAP-ASLI_5x5.5 [mm] "Aluminium Electrolytic V-Chip SMT Capacitors, 5x5.5mm"
  rect 3x1.6 smd: 1(-2.2,0) 2(2.2,0)
  silkscreen extent -2.75,-2.75 2.75,2.75, body extent -3,-2.65 3,2.65, height 5.5
"WE-CBF_0805_High Current" [mm] "SMD EMI Suppression Ferrite  Bead, body 2.0mmx1.2mm"
  rect 1.4x1 smd: 1(-1.3,0) 2(1.3,0)
  silkscreen extent -2.25,-0.75 2.25,0.75, body extent -1,-0.6 1,0.6, height 0.93
WL-SMCW_0603 [mm] "SMD Mono-color Chip LED, body 1.6x0.8mm"
  rect 0.8x0.8 smd: 1(-0.8,0) 2(0.8,0)
  silkscreen extent -1.59,-0.7 1.45,0.65, body extent -0.8,-0.4 0.8,0.4, height 0.7

## Part data
C1 C5A C5B C5C C5D C30 C31 C41 C42 C48 C59 C69 C70 C76 C87: library part Cap_0603, Dielectric=X5R, MPN=CC0603KRX7R9BB104, Package=0603, Supplier Part Number 1=603-CC603KRX7R9BB104, Voltage=50V, MF=Yageo, Supplier 1=Mouser, Supplier 2=Mouser, Supplier Part Number 2=710-885382206004
C6A C6B C6C C6D C7A C7B C7C C7D: library part Cap_0603, Dielectric=X5R, MPN=JMK107BJ105MA-T, Package=0603, Supplier Part Number 1=963-JMK107BJ105MA-T, Voltage=6.3V, MF="Taiyo Yuden", Supplier 1=Mouser
C8A C8B C8C C8D C10A C10B C10C C10D: library part Cap_0603, Dielectric=X7R, MPN=C0603C183K4RACTU, Package=0603, Supplier Part Number 1=80-C0603C183K4R, Voltage=16V, MF=Kemet, Supplier 1=Mouser
C9A C9B C9C C9D: library part Cap_0603, Dielectric=X7R, MPN=CC0603KRX7R7BB123, Package=0603, Supplier Part Number 1=603-CC603KRX7R7BB123, Voltage=16V, MF=Yageo, Supplier 1=Mouser
C16 C22 C23 C29 C39 C47 C52 C53 C64 C81 C92: library part Cap_0603, Dielectric=X7R, MPN=885012206065, Package=0603, Supplier Part Number 1=710-885012206065, Voltage=25V, Supplier 1=Mouser
  C16 C22 C23 C29 C92: MF="Würth Elektronik", Supplier 2=Digi-Key, Supplier Part Number 2=732-7983-1-ND
  C39 C47 C52 C53 C64 C81: MF=Würth
C17 C19 C21 C24 C26 C28 C33 C35 C36 C43 C45 C46 C49 C51 C60 C61 C71 C77 C78 C88 C89 C98 C99: library part C_1206, "Capacitor 1206", Dielectric=X5R, MPN=CL31A106KPHNNNE, Package=1206, Supplier Part Number 1=187-CL31A106KPHNNNE, Tolerance=10%, Voltage=10V, Created=2020_09_17_Liegmann, MF="Samsung Electro-Mechanics", Supplier 1=Mouser
C18 C20 C25 C27 C34 C44 C50 C57 C63 C74 C80 C85 C91 C96 C97 C102: library part Cap_0603, Dielectric=X5R, MPN=CC0603KRX7R9BB104, Package=0603, Supplier Part Number 1=603-CC603KRX7R9BB104, Tolerance=10%, Voltage=50V, MF=Yageo, Supplier 1=Mouser, Supplier 2=Mouser, Supplier Part Number 2=710-885382206004
C54 C65 C82: library part Cap_0603, Dielectric=C0G, MPN=C0603C752J3GACTU, Package=0603, Supplier Part Number 1=80-C0603C752J3GACTU, Voltage=25V, MF=KEMET, Supplier 1=Mouser
C55 C56 C66 C67 C68 C83 C84: "Capacitor 1206", Dielectric=X5R, MPN=1206DD106MAT2A, Package=1206, Supplier Part Number 1=581-1206DD106MAT2A, Tolerance=20%, Voltage=35V, MF=AVX, Supplier 1=Mouser
C58 C75 C86: "Capacitor 1206", Dielectric=C0G, MPN=GRM3195C1H273JA01D, Package=1206, Supplier Part Number 1=81-GRM315C1H273JA01D, Tolerance=5%, Voltage=50V, Created=2018_06_25_AGeiger, MF=Murata, Supplier 1=Mouser
C62 C79 C90 C101: library part 865080142007, "WCAP-ASLI Aluminum Electrolytic Capacitor, V-Chip, SMT, D5xH5.5mm, 47uF, 10V", Capacitance Tolerance=+/-20%, Leakage Current=6.3uA, MPN=865080242004, Operating Temperature="-55 to +105degC", Ripple Current=170mA, Supplier Part Number 1=710-865080242004, Voltage=10V, ComponentLink1Description=Manufacturer, ComponentLink1URL=http://www.we-online.de, ComponentLink2Description=Datasheet, ComponentLink2URL=https://www.we-online.com/catalog/datasheet/865080142007.pdf, Diameter=5mm, Dissipation Factor=24%, Endurance=2000h, Height=5.5mm, MF="Wurth Elektronik", Mounting Technology=SMT, Packaging="Tape and Reel", Published Date="May 2020", Supplier 1=Mouser, Technical Reference=ASEC055101M6R3DVCTBB000
C93: library part Cap_0603, Dielectric=C0G, MPN=C0603C752J3GACTU, Package=0603, possibleValue=7.5nF, Supplier Part Number 1=80-C0603C752J3GACTU, Tolerance=5%, Voltage=25V, MF=KEMET, Supplier 1=Mouser
C94 C95: library part C_1206, "Capacitor 1206", Dielectric=X5R, MPN=1206DD106MAT2A, Package=1206, Supplier Part Number 1=581-1206DD106MAT2A, Tolerance=20%, Voltage=35V, MF=AVX, Supplier 1=Mouser
C100: library part C_1206, "Capacitor 1206", Dielectric=C0G, MPN=GRM3195C1H273JA01D, Package=1206, possibleValue=0.027µF, Supplier Part Number 1=81-GRM315C1H273JA01D, Tolerance=5%, Voltage=50V, MF="Murata Electronics", Supplier 1=Mouser
D1 D3 D4: library part LED_Green_0603, "WL-SMCW SMD Mono-color Chip LED Waterclear, size 0603, Green, 3.2 V, 140°", Emitting Color=Green, Forward Voltage="3.2 V", Package=0603, Supplier Part Number 1=2322070, ComponentLink1Description=Manufacturer, ComponentLink1URL=http://www.we-online.de, ComponentLink2Description=Datasheet, ComponentLink2URL=http://katalog.we-online.com/led/datasheet/150060GS75000.pdf, Created=2018_09_06_AGeiger, Dominant Wavelength="520 nm", Luminous Intensity="430 mcd", MF="Wuerth Elektronik", MPN=150060GS75000, Peak Wavelength="515 nm", Published Date="Sep. 2017", Size=0603, Supplier 1=Farnell, Supplier 2=Mouser, Supplier 3=Digi-Key, Supplier Part Number 2=710-150060GS75000, Supplier Part Number 3=732-4971-1-ND, Viewing Angle=140°
D2: library part LED_Blue_0603, "WL-SMCW SMD Mono-color Chip LED Waterclear, size 0603, Blue, 3.2 V, 140°", Emitting Color=Blue, Forward Voltage="3.2 V", Package=0603, Supplier Part Number 1=2322069, ComponentLink1Description=Manufacturer, ComponentLink1URL=http://www.we-online.de, ComponentLink2Description=Datasheet, ComponentLink2URL=http://katalog.we-online.com/led/datasheet/150060BS75000.pdf, Created=2018_09_06_AGeiger, Dominant Wavelength="470 nm", Luminous Intensity="145 mcd", MF="Wuerth Elektronik", MPN=150060BS75000, Peak Wavelength="465 nm", Published Date="Sep. 2017", Size=0603, Supplier 1=Farnell, Supplier 2=Mouser, Supplier 3=Digi-Key, Supplier Part Number 2=710-150060BS75000, Supplier Part Number 3=732-4966-1-ND, Viewing Angle=140°
D5 D6 D7: library part LED_Red_0603, "WL-SMCW SMD Mono-color Chip LED Waterclear, size 0603, Red, 2 V, 140°", Emitting Color=Red, Forward Voltage="2 V", Package=0603, Supplier Part Number 1=2322071, ComponentLink1Description=Manufacturer, ComponentLink1URL=http://www.we-online.de, ComponentLink2Description=Datasheet, ComponentLink2URL=http://katalog.we-online.com/led/datasheet/150060RS75000.pdf, Created=2018_09_06_AGeiger, Dominant Wavelength="625 nm", Luminous Intensity="250 mcd", MF="Wuerth Elektronik", MPN=150060RS75000, Peak Wavelength="630 nm", Published Date="Sep. 2017", Size=0603, Supplier 1=Farnell, Supplier 2=Mouser, Supplier 3=Digi-Key, Supplier Part Number 2=710-150060RS75000, Supplier Part Number 3=732-4978-1-ND, Viewing Angle=140°
D8 D9 D10 D11: "Schottky Diode", Forward Voltage=750mV, MPN=BYS12-90-E3/TR3, Package=DO-214AC, Rated Current=1.5A, Reverse Voltage=90V, Supplier Part Number 1=2889144, ComponentLink1Description=Manufacturer, ComponentLink1URL=https://www.vishay.com/, ComponentLink2Description=Datasheet, ComponentLink2URL=https://www.vishay.com/docs/88950/bys12-90.pdf, MF=Vishay, Supplier 1=Farnell, Supplier 2=Mouser, Supplier 3=Digi-Key, Supplier Part Number 2=625-BYS12-90-E3/TR3, Supplier Part Number 3=BYS12-90-E3/GICT-ND
L1A L1B L1C L1D L6 L7 L8 L9 L10 L11 L13 L15 L16: library part "WE-CBF, 742792040", "WE-CBF SMD EMI Suppression Ferrite Bead, 0805, 600O", MPN=742792040, Supplier Part Number 1=2761567, ComponentLink1Description=Manufacturer, ComponentLink1URL=http://www.we-online.de, ComponentLink2Description=Datasheet, ComponentLink2URL=http://katalog.we-online.de/pbs/datasheet/742792040.pdf, MF="Wurth Elektronik", PublishedDate="Aug 2016", Size=0805, Supplier 1=Farnell, Supplier 2=Mouser, Supplier 3=Digi-Key, Supplier Part Number 2=710-742792040, Supplier Part Number 3=732-1620-1-ND, Type="High Current"
L2 L3 L4 L5 L18: library part "WE-CBF, 742792040", "WE-CBF SMD EMI Suppression Ferrite Bead, 0805, 600O", MPN=742792040, Supplier Part Number 1=1635735, ComponentLink1Description=Manufacturer, ComponentLink1URL=http://www.we-online.de, ComponentLink2Description=Datasheet, ComponentLink2URL=http://katalog.we-online.de/pbs/datasheet/742792040.pdf, MF="Würth Elektronik", Size=0805, Supplier 1=Farnell, Supplier 2=Mouser, Supplier 3=Digi-Key, Supplier Part Number 2=710-742792040, Supplier Part Number 3=732-1620-1-ND, Type="High Current"
L12 L14 L17 L19: library part B82464G4154M, "SMT power Inductor, 150uH, 320m DRC", Rated Current="0.85 A", Supplier Part Number 1=871-B82464G4154M, ComponentLink1Description=Manufacturer, ComponentLink1URL=https://www.tdk-electronics.tdk.com/de, ComponentLink2Description=Datasheet, ComponentLink2URL=https://www.tdk-electronics.tdk.com/inf/30/db/ind_2008/b82464g4.pdf, DCR=320m, MF="EPCOS / TDK", MPN=B82464G4154M, Supplier 1=Mouser
R1 R2: library part R_0603, MPN=CRCW0603100RFKEAC, Package=0603, Supplier Part Number 1=71-CRCW0603100RFKEAC, MF="Vishay / Dale", Supplier 1=Mouser
R3 R4 R5 R6 R14A R14B R14C R14D R31 R32 R58: library part R_0603, MPN=CRCW06030000Z0EBC, Package=0603, Supplier Part Number 1=71-CRCW06030000Z0EBC, MF="Vishay / Dale", Supplier 1=Mouser
R7 R8 R9 R10: library part R_0603, MPN=CRCW06034R99FKEA, Supplier Part Number 1=71-CRCW0603-4.99-E3, Tolerance=1%, MF="Vishay / Dale", Supplier 1=Mouser
R12A R12B R12C R12D R13A R13B R13C R13D: library part R_0603, MPN=RC0603FR-1324R9L, Package=0603, Supplier Part Number 1=603-RC0603FR-1324R9L, MF=Yageo, Supplier 1=Mouser
R20 R25: library part R_0603, MPN=CR0603-FX-3482ELF, Package=0603, Supplier Part Number 1=652-CR0603FX-3482ELF, Tolerance=1%, MF=Bourns, Supplier 1=Mouser
R21: library part R_0603, MPN=CR0603-FX-1022ELF, Package=0603, Supplier Part Number 1=652-CR0603FX-1022ELF, Tolerance=1%, MF=Bourns, Supplier 1=Mouser
R26: library part R_0603, MPN=CR0603-FX-1002ELF, Package=0603, Supplier Part Number 1=652-CR0603FX-1002ELF, Tolerance=1%, MF=Bourns, Supplier 1=Mouser
R27: library part R_0603, MPN=CRCW060324K9FKEAC, Package=0603, Supplier Part Number 1=71-CRCW060324K9FKEAC, MF="Vishay / Dale", Supplier 1=Mouser
R28 R29 R38: library part R_0603, MPN=RCS06036K04FKEA, Package=0603, Supplier Part Number 1=71-RCS06036K04FKEA, MF="Vishay / Dale", Supplier 1=Mouser
R30 R36 R37: library part R_0603, MPN=CRCW0603499RFKEAC, Package=0603, Supplier Part Number 1=71-CRCW0603499RFKEAC, MF="Vishay / Dale", Supplier 1=Mouser
R39: library part R_0603, MPN=CRCW06031M00FKEAC, Package=0603, Supplier Part Number 1=71-CRCW06031M00FKEAC, Tolerance=1%, MF="Vishay / Dale", Supplier 1=mouser
R40 R45 R50 R55: library part R_0603, MPN=CR0603-FX-1623ELF, Package=0603, Supplier Part Number 1=652-CR0603-FX1623ELF, MF=Bourns, Supplier 1=Mouser
R41 R46 R51: library part R_0603, MPN=AC0603FR-1375KL, Package=0603, Supplier Part Number 1=603-AC0603FR-1375KL, MF=Yageo, Supplier 1=Mouser
R42 R47 R52 R57: library part R_0603, MPN=CR0603-FX-1621ELF, Package=0603, Supplier Part Number 1=652-CR0603FX-1621ELF, Tolerance=1%, MF=Bourns, Supplier 1=Mouser
R43 R48 R53 R60: library part R_0603, MPN=CR0603-FX-1333ELF, Package=0603, Supplier Part Number 1=652-CR0603FX-1333ELF, MF=Bourns, Supplier 1=Mouser
R44 R49 R54 R59: library part R_0603, MPN=CR0603-FX-1021ELF, Package=0603, Supplier Part Number 1=652-CR0603FX-1021ELF, Tolerance=1%, MF=Bourns, Supplier 1=Mouser
R56: library part R_0603, MPN=AC0603FR-1375KL, Package=0603, possibleValue=75k, Supplier Part Number 1=603-AC0603FR-1375KL, MF=Yageo, Supplier 1=Mouser
TP1 TP2 TP3 TP4 TP5 TP6 TP7 TP8 TP9 TP10 TP11 TP12 TP13A TP13B TP13C TP13D TP14A TP14B TP14C TP14D TP15 TP16 TP17 TP18 TP19 TP20 TP21 TP22 TP23 TP24 TP25 TP26 TP27: "Testpoint 1mm", Created=2018_06_25_AGeiger
U1: "4-channel output LVCMOS 1.8-V buffer", Frequency=250MHz, Manufacturer="Texas Instruments", Manufacturer Part Number=LMK1C1104PWR, Max Supply Voltage=3.465V, Min Supply Voltage=1.71V, Package=TSSOP, Supplier Part Number 1=595-LMK1C1104PWR, ComponentLink1Description=Manufacturer, ComponentLink1URL=https://www.ti.com/, ComponentLink2Description=Datasheet, ComponentLink2URL=https://www.ti.com/lit/ds/symlink/lmk1c1104.pdf?ts=1616933763692&ref_url=https%253A%252F%252Fwww.ti.com%252Fproduct%252FLMK1C1104, Input=LVCMOS, Mount="Surface Mount", Number of Outputs=4, Number of Pins=8, Propagation Delay=3ns, Supplier 1=Mouser
U3 U5: "150mA, LDO, Vout = 2.5V, Vin,max = 16V", Package=SOT-23-5, Supplier Part Number 1=595-LP2985A-25DBVR, ComponentLink1Description=Manufacturer, ComponentLink1URL=https://www.ti.com/, ComponentLink2Description=Datasheet, ComponentLink2URL=https://www.ti.com/lit/ds/symlink/lp2985a.pdf, MF="Texas Instruments", MPN=LP2985A-25, Supplier 1=Mouser
U4A U4B U4C U4D: library part LTC2311-16, "16 Bit SAR ADC, 5MSps", MPN=LTC2311CMSE-16#PBF, Package=MSOP-16, Supplier Part Number 1=584-C2311CMSE-16PBF, ComponentLink1Description=Manufacturer, ComponentLink1URL=https://www.analog.com/en/index.html, ComponentLink2Description=Datasheet, ComponentLink2URL=https://www.analog.com/media/en/technical-documentation/data-sheets/231116fa.pdf, MF="Analog Devices", Supplier 1=Mouser, Supplier 2=Digi-Key, Supplier Part Number 2=LTC2311CMSE-16#PBF-ND
U7: "150mA, LDO, Vout = 1.8V , Vin,max = 16V", Manufacturer 1="Texas Instruments", Package=SOT-23-5, Supplier Part Number 1=595-LP2985A-18DBVJ, ComponentLink1Description=Manufacturer, ComponentLink1URL=https://www.ti.com/, ComponentLink2Description=Datasheet, ComponentLink2URL=https://www.ti.com/lit/ds/symlink/lp2985a.pdf, Manufacturer Part Number 1=LP2985A-18, Supplier 1=Mouser
U8 U9 U10 U11: "Buck Converter, 9-75Vin, 2.5-73Vout", MPN=LM5007MM/NOPB, Package=VSSOP-8, Supplier Part Number 1=9779345, ComponentLink1Description=Manufacturer, ComponentLink1URL=https://www.ti.com/, ComponentLink2Description=Datasheet, ComponentLink2URL=https://www.ti.com/lit/ds/symlink/lm5007.pdf?ts=1616234834930&ref_url=https%253A%252F%252Fwww.google.ru%252F, MF="Texas Instruments", Supplier 1=Farnell, Supplier 2=Mouser, Supplier 3=Digi-Key, Supplier Part Number 2=926-LM5007MM/NOPB, Supplier Part Number 3=LM5007MM/NOPBCT-ND
U12: library part LT6654, MPN=LT6654AIS6-5#TRMPBF, Package=TSOT-23-6, Supplier Part Number 1=2761960, ComponentLink1Description=Manufacturer, ComponentLink1URL=https://www.analog.com/en/index.html, ComponentLink2Description=Datasheet, ComponentLink2URL=https://www.analog.com/media/en/technical-documentation/data-sheets/6654fh.pdf, MF="Analog Devices", Supplier 1=Farnell, Supplier 2=Mouser, Supplier 3=Digi-Key, Supplier Part Number 2=584-6654AIS65TRMPBF, Supplier Part Number 3=LT6654AIS6-5#TRMPBFCT-ND
X1: "Mating Card Layout for HSEC8-140-01-XX-DV-A-BL", Manufacturer=SAMTEC, Created=2018_04_23_AGeiger

## Via types
v1: diameter 0.5, hole 0.2, Top Layer to Bottom Layer, 24 vias

## Nets (pads, with @x,y where several pads share a name; then routed paths per layer and width w, separated by ;. In a path a pad name is that pad's centre, name@x,y a point inside that pad or via, vN(x,y) a via of type N, cw(c..) or ccw(c..) an arc to the next point about the centre after c; other vN are vias at no path point)
6.5V: C65.1 C76.2 C77.2 C78.2 C79.2 L6.1 L8.1 L10.1 L14.2 R47.2 TP22.1
13.5V: C82.1 C87.2 C88.2 C89.2 C90.2 L4.1 L17.2 R52.2 TP24.1
24V: C54.1 C59.2 C60.2 C61.2 C62.2 L12.2 R42.2 TP20.1
24V_N: C94.2 C95.2 C96.1 L18.2 R55.2 TP25.1 U11.8
24V_P: C55.2 C56.2 C57.1 C66.2 C67.2 C74.1 C83.2 C84.2 C85.1 L11.2 L13.2 L15.2 R40.1 R45.1 R50.1 TP19.1 TP21.1 TP23.1 U8.8 U9.8 U10.8
+1.8V: C1.1 C48.1 C51.2 R37.2 TP16.1 U1.2 U1.6 U7.5
+2.5V: C7A.1 C7B.1 C7C.1 C7D.1 C30.1 C35.2 C41.1 C42.1 C45.2 C46.2 L7.1 L9.1 L9.2 R36.2 TP7.1 TP9.1 TP15.1 U3.5 U4A.10 U4A.12 U4B.10 U4B.12 U4C.10 U4C.12 U4D.10 U4D.12 U5.5
+5V: C31.1 C36.2 L7.2 R30.2 TP8.1
+12V: R29.2
+24V: R28.2
-12V: R38.1
-13.5V: C94.1 C95.1 C96.2 C97.1 C98.1 C99.1 C101.1 C102.2 D11.2 L2.1 R59.2 R60.1 TP26.1 U11.4
-VCC: 
A0: 
A1: 
A2: 
ADC_INA_N: C9A.2 C10A.1 R13A.2 TP14A.1 U4A.7
ADC_INA_P: C8A.2 C9A.1 R12A.2 TP13A.1 U4A.6
ADC_INB_N: C9B.2 C10B.1 R13B.2 TP14B.1 U4B.7
ADC_INB_P: C8B.2 C9B.1 R12B.2 TP13B.1 U4B.6
ADC_INC_N: C9C.2 C10C.1 R13C.2 TP14C.1 U4C.7
ADC_INC_P: C8C.2 C9C.1 R12C.2 TP13C.1 U4C.6
ADC_IND_N: C9D.2 C10D.1 R13D.2 TP14D.1 U4D.7
ADC_IND_P: C8D.2 C9D.1 R12D.2 TP13D.1 U4D.6
ADC_OUT_N1: U4A.13
ADC_OUT_N2: U4B.13
ADC_OUT_N3: U4C.13
ADC_OUT_N4: U4D.13
ADC_OUT_P1: U4A.14
ADC_OUT_P2: U4B.14
ADC_OUT_P3: U4C.14
ADC_OUT_P4: U4D.14
AOUT_N1: X1.43
AOUT_N2: X1.37
AOUT_N3: X1.31
AOUT_N4: X1.25
AOUT_P1: X1.41
AOUT_P2: X1.35
AOUT_P3: X1.29
AOUT_P4: X1.23
BCLK_N: R2.1 TP3.1 X1.20
BCLK_P: R2.2 TP4.1 X1.18
BOUT_N1: X1.44
BOUT_N2: X1.38
BOUT_N3: X1.32
BOUT_N4: X1.26
BOUT_P1: X1.42
BOUT_P2: X1.36
BOUT_P3: X1.30
BOUT_P4: X1.24
CLK_N: R1.1 TP1.1 U4A.15 U4B.15 U4C.15 U4D.15 X1.19
CLK_P: R1.2 TP2.1 U4A.16 U4B.16 U4C.16 U4D.16 X1.17
CVN1: R7.2 U4A.9
CVN2: R8.2 U4B.9
CVN3: R9.2 U4C.9
CVN4: R10.2 U4D.9
CVN_A: R3.1 U1.1
CVN_B: R3.2 R58.2 TP11.1
FB_Neg: C100.2 R57.2 R59.1 U11.5
GND: C1.2 C5A.2 C5B.2 C5C.2 C5D.2 C6A.2 C6B.2 C6C.2 C6D.2 C7A.2 C7B.2 C7C.2 C7D.2 C8A.1 C8B.1 C8C.1 C8D.1 C10A.2 C10B.2 C10C.2 C10D.2 C17.1 C18.2 C19.1 C20.1 C21.1 C22.2 C24.1 C25.2 C26.1 C27.1 C28.1 C29.2 C30.2 C31.2 C33.1 C34.2 C35.1 C36.1 C39.1 C41.2 C42.2 C43.1 C44.2 C45.1 C46.1 C47.1 C48.2 C49.1 C50.2 C51.1 C52.1 C55.1 C56.1 C57.2 C59.1 C60.1 C61.1 C62.1 C63.2 C66.1 C67.1 C68.1 C69.2 C70.2 C71.1 C74.2 C76.1 C77.1 C78.1 C79.1 C80.2 C83.1 C84.1 C85.2 C87.1 C88.1 C89.1 C90.1 C91.2 C93.1 C97.2 C98.2 C99.2 C101.2 D1.2 D2.1 D3.1 D4.1 D5.1 D6.1 D7.1 D8.2 D9.2 D10.2 L19.2 R6.1 R14A.1 R14B.1 R14C.1 R14D.1 R21.2 R26.2 R43.1 R44.1 R48.1 R49.1 R53.1 R54.1 R57.1 TP17.1 U1.4 U3.2 U4A.1 U4A.5 U4A.8 U4A.11 U4A.17 U4B.1 U4B.5 U4B.8 U4B.11 U4B.17 U4C.1 U4C.5 U4C.8 U4C.11 U4C.17 U4D.1 U4D.5 U4D.8 U4D.11 U4D.17 U5.2 U7.2 U8.4 U9.4 U10.4 U12.1 U12.2 X1.1 X1.2 X1.3 X1.4 X1.7 X1.8 X1.11 X1.12 X1.15 X1.16 X1.21 X1.22 X1.27 X1.28 X1.33 X1.34 X1.39 X1.40 X1.45 X1.46 X1.51 X1.52 X1.57 X1.58 X1.63 X1.64 X1.69 X1.70 X1.75 X1.76
  other v1: 201.691,98.462 202.791,98.462 203.891,98.462 201.691,99.562 202.791,99.562 203.891,99.562 201.691,114.462 202.791,114.462 203.891,114.462 201.691,115.562 202.791,115.562 203.891,115.562 201.691,130.462 202.791,130.462 203.891,130.462 201.691,131.562 202.791,131.562 203.891,131.562 201.691,147.462 202.791,147.462 203.891,147.462 201.691,148.562 202.791,148.562 203.891,148.562
IEPE_IN2: 
IEPE_IN3: 
IEPE_IN4: 
IEPE_IN11: 
IEPE_IN12: 
IEPE_IN13: 
IEPE_IN14: 
Net3.5mAA_2: 
Net3.5mAB_2: 
Net3.5mAC_2: 
Net3.5mAD_2: 
NetC2A_1: 
NetC2B_1: 
NetC2C_1: 
NetC2D_1: 
NetC3A_1: 
NetC3A_2: 
NetC3B_1: 
NetC3B_2: 
NetC3C_1: 
NetC3C_2: 
NetC3D_1: 
NetC3D_2: 
NetC11A_1: R14A.2 U4A.2
NetC11B_1: R14B.2 U4B.2
NetC11C_1: R14C.2 U4C.2
NetC11D_1: R14D.2 U4D.2
NetC16_1: C16.1 C19.2 L3.1 R25.1
NetC16_2: C16.2 R25.2 R26.1
NetC17_2: C17.2 C18.1 L2.2
NetC22_1: C22.1
NetC23_1: C23.1 C26.2 L5.1 R20.1
NetC23_2: C23.2 R20.2 R21.1
NetC29_1: C29.1
NetC32A_2: 
NetC32B_2: 
NetC32C_2: 
NetC32D_2: 
NetC38A_2: 
NetC38B_2: 
NetC38C_2: 
NetC38D_2: 
NetC39_2: C39.2 U3.4
NetC40A_2: 
NetC40B_2: 
NetC40C_2: 
NetC40D_2: 
NetC47_2: C47.2 U5.4
NetC52_2: C52.2 U7.4
NetC53_1: C53.1 U8.2
NetC54_2: C54.2 C58.2 R41.2
NetC58_1: C58.1 R42.1 R44.2 U8.5
NetC63_1: C63.1 U8.7
NetC64_1: C64.1 U9.2
NetC65_2: C65.2 C75.2 R46.2
NetC75_1: C75.1 R47.1 R49.2 U9.5
NetC80_1: C80.1 U9.7
NetC81_1: C81.1 U10.2
NetC82_2: C82.2 C86.2 R51.2
NetC86_1: C86.1 R52.1 R54.2 U10.5
NetC91_1: C91.1 U10.7
NetC92_2: C92.2 U11.2
NetC93_2: C93.2 C100.1 R56.1
NetD1_1: D1.1 R38.2
NetD2_2: D2.2 R27.1
NetD3_2: D3.2 R28.1
NetD4_2: D4.2 R29.1
NetD5_2: D5.2 R30.1
NetD6_2: D6.2 R36.1
NetD7_2: D7.2 R37.1
NetIC1A_3: 
NetIC1A_4: 
NetIC1A_5: 
NetIC1A_6: 
NetIC1A_7: 
NetIC1A_14: 
NetIC1B_3: 
NetIC1B_14: 
NetIC1C_3: 
NetIC1C_14: 
NetIC1D_3: 
NetIC1D_14: 
NetIC3_5: R39.2
NetL16_1: L16.1 R31.2 R32.2
NetR4_2: R4.2 R5.1 R6.2 X1.79
NetR5_2: R5.2 X1.80
NetR7_1: R7.1 U1.3
NetR8_1: R8.1 U1.8
NetR9_1: R9.1 U1.5
NetR10_1: R10.1 U1.7
NetR43_2: R43.2 U8.3
NetR48_2: R48.2 U9.3
NetR53_2: R53.2 U10.3
NetR58_1: R58.1 X1.54
NetTP5_1: TP5.1 X1.47
NetTP6_1: TP6.1 X1.48
NetTP10_1: TP10.1 X1.53
NetTP12_1: TP12.1 X1.56
NetX1_78: X1.78
OUT0: 
OUT1: 
OUT2: 
OUT3: 
OUT4: 
OUT5: 
OUT6: 
OUT7: 
OUT8: 
OUT9: 
OUT10: 
OUT11: 
OUT12: 
OUT13: 
OUT14: 
OUT15: 
OUT_N2: R13B.1
OUT_N3: R13C.1
OUT_N4: R13D.1
OUT_N11: R13A.1
OUT_N12: 
OUT_N13: 
OUT_N14: 
OUT_P2: R12B.1
OUT_P3: R12C.1
OUT_P4: R12D.1
OUT_P11: R12A.1
OUT_P12: 
OUT_P13: 
OUT_P14: 
RCL_N: R60.2 U11.3
REFOUTA: L1A.1 U4A.3
REFOUTB: L1B.1 U4B.3
REFOUTC: L1C.1 U4C.3
REFOUTD: L1D.1 U4D.3
Ron_N: R55.1 U11.6
Ron_P: R40.2 R45.2 R50.2 U8.6 U9.6 U10.6
SCL: X1.49
SCL_B: 
SDA: X1.50